# Altium PCB PCB.PcbDoc (part 1 of 3)
Units mm, origin at the board's own origin, x right, y up, seen from the top; angles counter-clockwise.
Board outline 60.66 x 261 mm, 2 copper layers (Top Layer, Bottom Layer); 258 components, 193 nets, 900 pads, 4 vias.
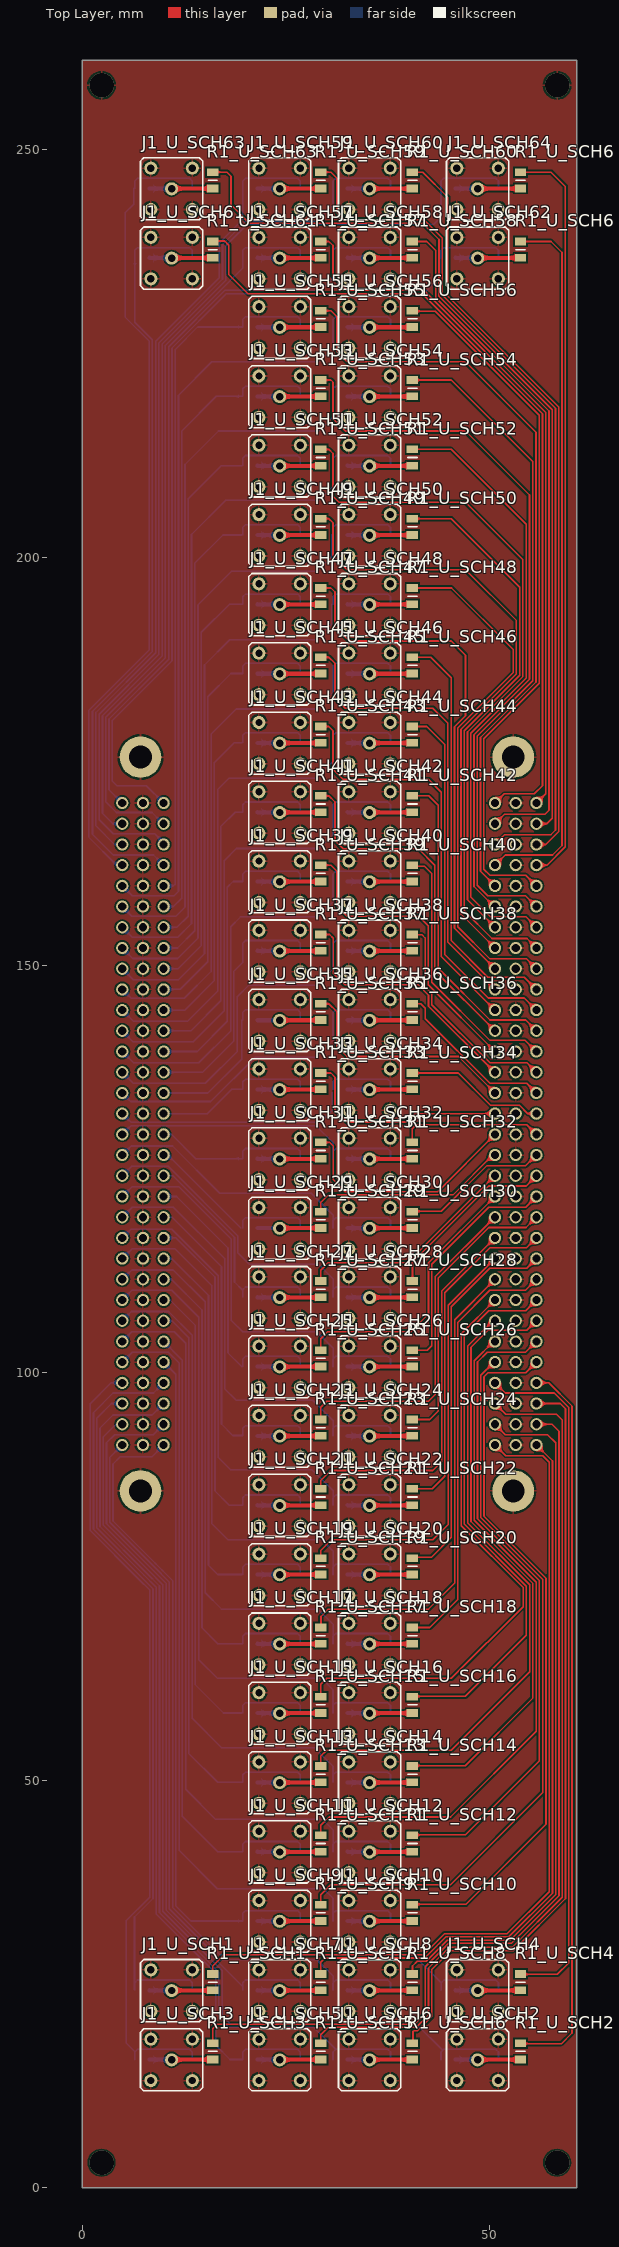
[diagram p0: Top Layer view]
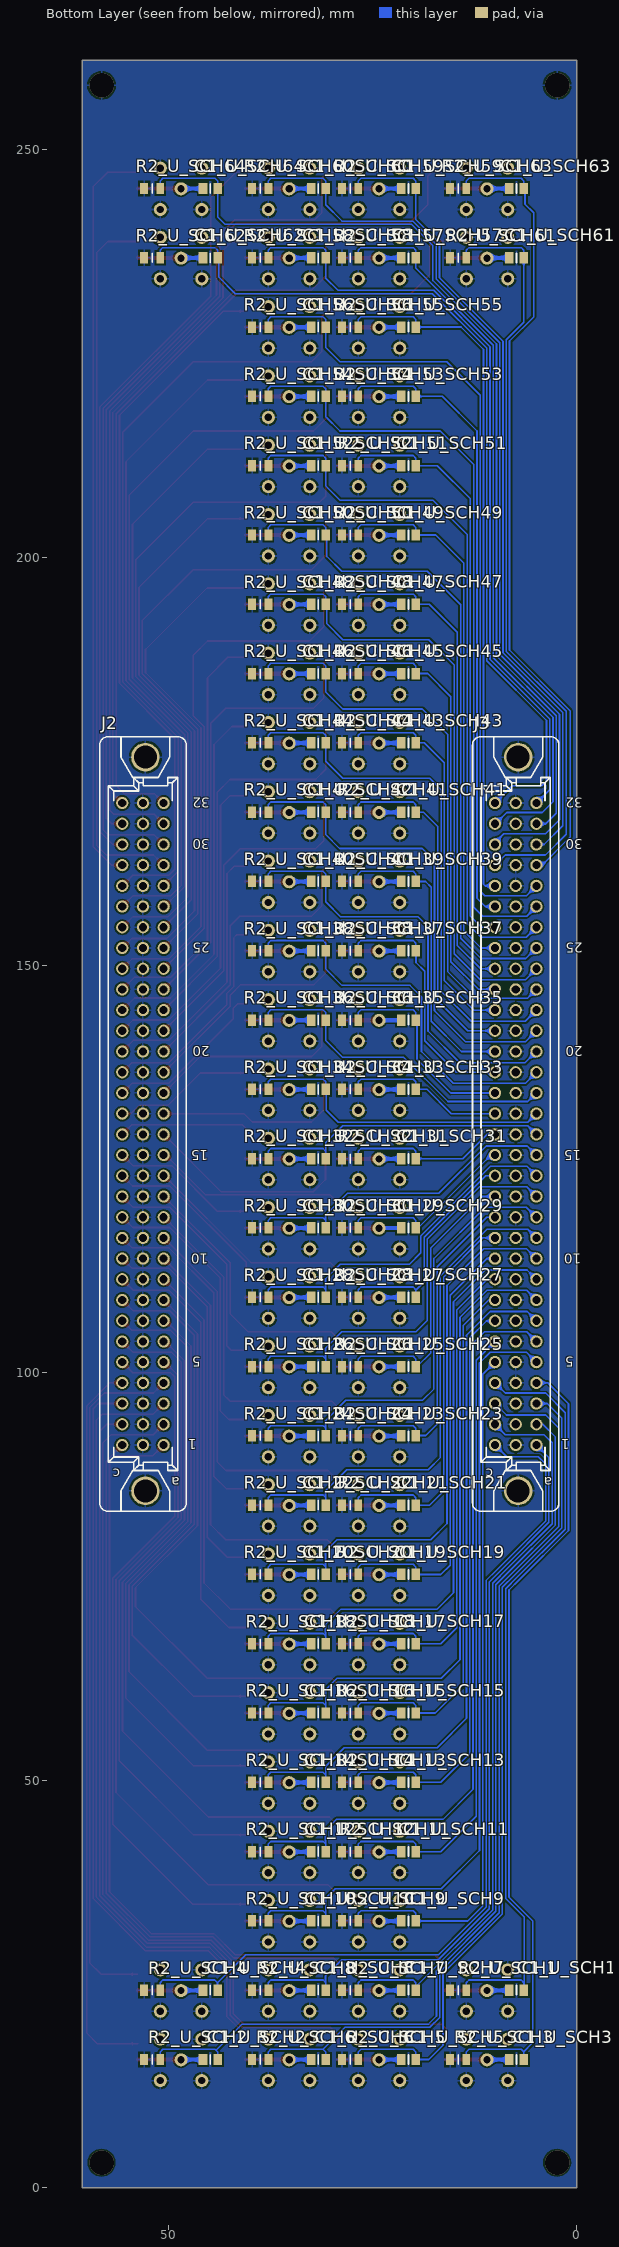
[diagram p1: Bottom Layer view, seen from below]
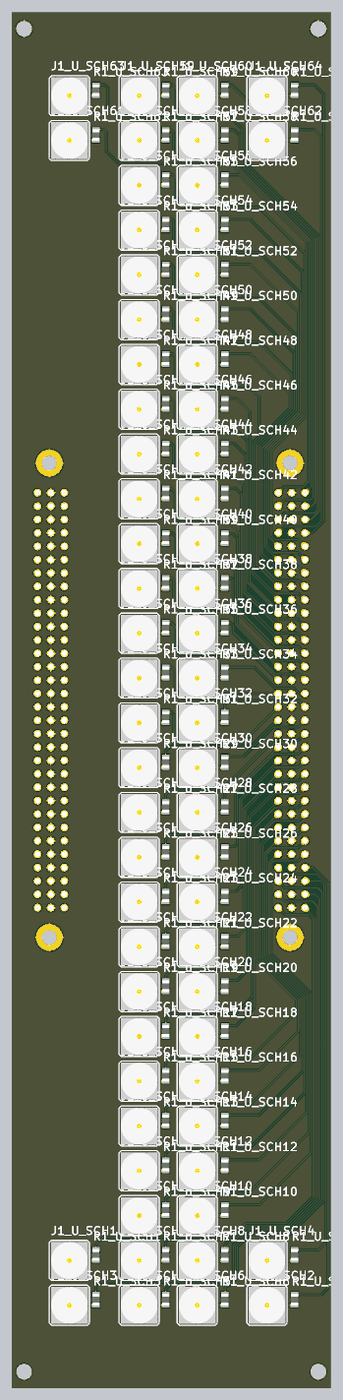
[diagram p4: 3D render of the assembled board from above, using the file's embedded part models]
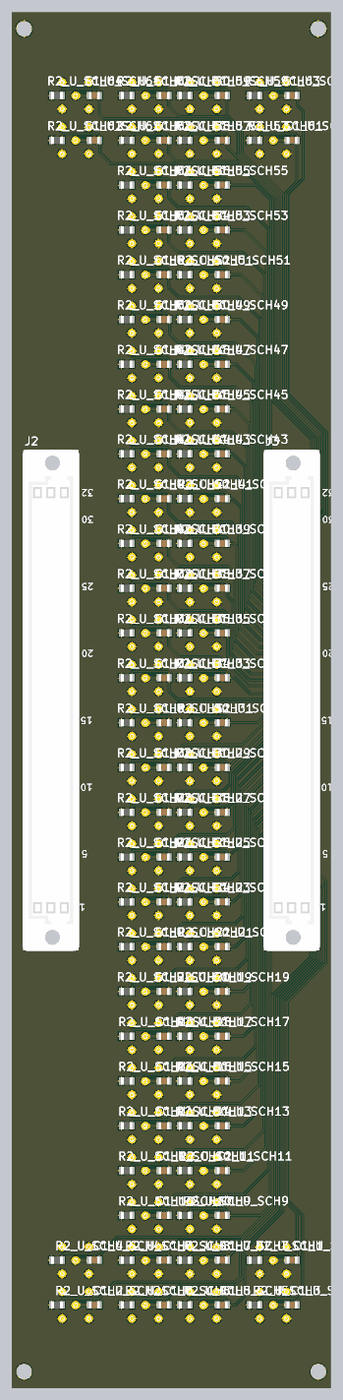
[diagram p5: 3D render of the assembled board from below, using the file's embedded part models]

## Layer stack, top to bottom
Top Solder: solder mask 0.0102, Solder Resist, Dk 3.5
Top Layer: signal copper 0.0356
Dielectric 1: dielectric 0.32, FR-4, Dk 4.8
Bottom Layer: signal copper 0.0356
Bottom Solder: solder mask 0.0102, Solder Resist, Dk 3.5

## Board outline
0,0 0,261 60.66,261 60.66,0

## Design rules (kind name [scope] priority, off if disabled: settings)
Clearance [All] p1: gap=0.2 ignorepadtopadclearanceinfootprint=FALSE
PolygonConnect [All] p1: connectstyle=Relief reliefconductorwidth=0.254 reliefentries=4 polygonreliefangle="90 Angle" airgapwidth=0.254
RoomDefinition Main [InComponentClass('Main')] p1: confinementstyle=ConfineIn formatcopy=TRUE lockcomponents=FALSE outline -73.725,-11.75 -22.925,-11.75 -22.925,13.65 -73.725,13.65
RoomDefinition U_SCH64 [InComponentClass('U_SCH64')] p2: confinementstyle=ConfineIn formatcopy=TRUE lockcomponents=FALSE outline 43.025,241 56.275,241 56.275,249.5 43.025,249.5
RoomDefinition U_SCH63 [InComponentClass('U_SCH63')] p3: confinementstyle=ConfineIn formatcopy=FALSE lockcomponents=FALSE outline 3.275,241 16.525,241 16.525,249.5 3.275,249.5
RoomDefinition U_SCH62 [InComponentClass('U_SCH62')] p4: confinementstyle=ConfineIn formatcopy=TRUE lockcomponents=FALSE outline 43.025,232.5 56.275,232.5 56.275,241 43.025,241
RoomDefinition U_SCH61 [InComponentClass('U_SCH61')] p5: confinementstyle=ConfineIn formatcopy=FALSE lockcomponents=FALSE outline 3.275,232.5 16.525,232.5 16.525,241 3.275,241
RoomDefinition U_SCH60 [InComponentClass('U_SCH60')] p6: confinementstyle=ConfineIn formatcopy=TRUE lockcomponents=FALSE outline 29.775,241 43.025,241 43.025,249.5 29.775,249.5
RoomDefinition U_SCH59 [InComponentClass('U_SCH59')] p7: confinementstyle=ConfineIn formatcopy=FALSE lockcomponents=FALSE outline 16.525,241 29.775,241 29.775,249.5 16.525,249.5
RoomDefinition U_SCH58 [InComponentClass('U_SCH58')] p8: confinementstyle=ConfineIn formatcopy=TRUE lockcomponents=FALSE outline 29.775,232.5 43.025,232.5 43.025,241 29.775,241
RoomDefinition U_SCH57 [InComponentClass('U_SCH57')] p9: confinementstyle=ConfineIn formatcopy=FALSE lockcomponents=FALSE outline 16.525,232.5 29.775,232.5 29.775,241 16.525,241
RoomDefinition U_SCH56 [InComponentClass('U_SCH56')] p10: confinementstyle=ConfineIn formatcopy=TRUE lockcomponents=FALSE outline 29.775,224 43.025,224 43.025,232.5 29.775,232.5
RoomDefinition U_SCH55 [InComponentClass('U_SCH55')] p11: confinementstyle=ConfineIn formatcopy=FALSE lockcomponents=FALSE outline 16.525,224 29.775,224 29.775,232.5 16.525,232.5
RoomDefinition U_SCH54 [InComponentClass('U_SCH54')] p12: confinementstyle=ConfineIn formatcopy=TRUE lockcomponents=FALSE outline 29.775,215.5 43.025,215.5 43.025,224 29.775,224
RoomDefinition U_SCH53 [InComponentClass('U_SCH53')] p13: confinementstyle=ConfineIn formatcopy=FALSE lockcomponents=FALSE outline 16.525,215.5 29.775,215.5 29.775,224 16.525,224
RoomDefinition U_SCH52 [InComponentClass('U_SCH52')] p14: confinementstyle=ConfineIn formatcopy=TRUE lockcomponents=FALSE outline 29.775,207 43.025,207 43.025,215.5 29.775,215.5
RoomDefinition U_SCH51 [InComponentClass('U_SCH51')] p15: confinementstyle=ConfineIn formatcopy=FALSE lockcomponents=FALSE outline 16.525,207 29.775,207 29.775,215.5 16.525,215.5
RoomDefinition U_SCH50 [InComponentClass('U_SCH50')] p16: confinementstyle=ConfineIn formatcopy=TRUE lockcomponents=FALSE outline 29.775,198.5 43.025,198.5 43.025,207 29.775,207
RoomDefinition U_SCH49 [InComponentClass('U_SCH49')] p17: confinementstyle=ConfineIn formatcopy=FALSE lockcomponents=FALSE outline 16.525,198.5 29.775,198.5 29.775,207 16.525,207
RoomDefinition U_SCH48 [InComponentClass('U_SCH48')] p18: confinementstyle=ConfineIn formatcopy=TRUE lockcomponents=FALSE outline 29.775,190 43.025,190 43.025,198.5 29.775,198.5
RoomDefinition U_SCH47 [InComponentClass('U_SCH47')] p19: confinementstyle=ConfineIn formatcopy=FALSE lockcomponents=FALSE outline 16.525,190 29.775,190 29.775,198.5 16.525,198.5
RoomDefinition U_SCH46 [InComponentClass('U_SCH46')] p20: confinementstyle=ConfineIn formatcopy=TRUE lockcomponents=FALSE outline 29.775,181.5 43.025,181.5 43.025,190 29.775,190
RoomDefinition U_SCH45 [InComponentClass('U_SCH45')] p21: confinementstyle=ConfineIn formatcopy=FALSE lockcomponents=FALSE outline 16.525,181.5 29.775,181.5 29.775,190 16.525,190
RoomDefinition U_SCH44 [InComponentClass('U_SCH44')] p22: confinementstyle=ConfineIn formatcopy=TRUE lockcomponents=FALSE outline 29.775,173 43.025,173 43.025,181.5 29.775,181.5
RoomDefinition U_SCH43 [InComponentClass('U_SCH43')] p23: confinementstyle=ConfineIn formatcopy=FALSE lockcomponents=FALSE outline 16.525,173 29.775,173 29.775,181.5 16.525,181.5
RoomDefinition U_SCH42 [InComponentClass('U_SCH42')] p24: confinementstyle=ConfineIn formatcopy=TRUE lockcomponents=FALSE outline 29.775,164.5 43.025,164.5 43.025,173 29.775,173
RoomDefinition U_SCH41 [InComponentClass('U_SCH41')] p25: confinementstyle=ConfineIn formatcopy=FALSE lockcomponents=FALSE outline 16.525,164.5 29.775,164.5 29.775,173 16.525,173
RoomDefinition U_SCH40 [InComponentClass('U_SCH40')] p26: confinementstyle=ConfineIn formatcopy=TRUE lockcomponents=FALSE outline 29.775,156 43.025,156 43.025,164.5 29.775,164.5
RoomDefinition U_SCH39 [InComponentClass('U_SCH39')] p27: confinementstyle=ConfineIn formatcopy=FALSE lockcomponents=FALSE outline 16.525,156 29.775,156 29.775,164.5 16.525,164.5
RoomDefinition U_SCH38 [InComponentClass('U_SCH38')] p28: confinementstyle=ConfineIn formatcopy=TRUE lockcomponents=FALSE outline 29.775,147.5 43.025,147.5 43.025,156 29.775,156
RoomDefinition U_SCH37 [InComponentClass('U_SCH37')] p29: confinementstyle=ConfineIn formatcopy=FALSE lockcomponents=FALSE outline 16.525,147.5 29.775,147.5 29.775,156 16.525,156
RoomDefinition U_SCH36 [InComponentClass('U_SCH36')] p30: confinementstyle=ConfineIn formatcopy=TRUE lockcomponents=FALSE outline 29.775,139 43.025,139 43.025,147.5 29.775,147.5
RoomDefinition U_SCH35 [InComponentClass('U_SCH35')] p31: confinementstyle=ConfineIn formatcopy=FALSE lockcomponents=FALSE outline 16.525,139 29.775,139 29.775,147.5 16.525,147.5
RoomDefinition U_SCH34 [InComponentClass('U_SCH34')] p32: confinementstyle=ConfineIn formatcopy=TRUE lockcomponents=FALSE outline 29.775,130.5 43.025,130.5 43.025,139 29.775,139
RoomDefinition U_SCH33 [InComponentClass('U_SCH33')] p33: confinementstyle=ConfineIn formatcopy=FALSE lockcomponents=FALSE outline 16.525,130.5 29.775,130.5 29.775,139 16.525,139
RoomDefinition U_SCH32 [InComponentClass('U_SCH32')] p34: confinementstyle=ConfineIn formatcopy=TRUE lockcomponents=FALSE outline 29.775,122 43.025,122 43.025,130.5 29.775,130.5
RoomDefinition U_SCH31 [InComponentClass('U_SCH31')] p35: confinementstyle=ConfineIn formatcopy=FALSE lockcomponents=FALSE outline 16.525,122 29.775,122 29.775,130.5 16.525,130.5
RoomDefinition U_SCH30 [InComponentClass('U_SCH30')] p36: confinementstyle=ConfineIn formatcopy=TRUE lockcomponents=FALSE outline 29.775,113.5 43.025,113.5 43.025,122 29.775,122
RoomDefinition U_SCH29 [InComponentClass('U_SCH29')] p37: confinementstyle=ConfineIn formatcopy=FALSE lockcomponents=FALSE outline 16.525,113.5 29.775,113.5 29.775,122 16.525,122
RoomDefinition U_SCH28 [InComponentClass('U_SCH28')] p38: confinementstyle=ConfineIn formatcopy=TRUE lockcomponents=FALSE outline 29.775,105 43.025,105 43.025,113.5 29.775,113.5
RoomDefinition U_SCH27 [InComponentClass('U_SCH27')] p39: confinementstyle=ConfineIn formatcopy=FALSE lockcomponents=FALSE outline 16.525,105 29.775,105 29.775,113.5 16.525,113.5
RoomDefinition U_SCH26 [InComponentClass('U_SCH26')] p40: confinementstyle=ConfineIn formatcopy=TRUE lockcomponents=FALSE outline 29.775,96.5 43.025,96.5 43.025,105 29.775,105
RoomDefinition U_SCH25 [InComponentClass('U_SCH25')] p41: confinementstyle=ConfineIn formatcopy=FALSE lockcomponents=FALSE outline 16.525,96.5 29.775,96.5 29.775,105 16.525,105
RoomDefinition U_SCH24 [InComponentClass('U_SCH24')] p42: confinementstyle=ConfineIn formatcopy=TRUE lockcomponents=FALSE outline 29.775,88 43.025,88 43.025,96.5 29.775,96.5
RoomDefinition U_SCH23 [InComponentClass('U_SCH23')] p43: confinementstyle=ConfineIn formatcopy=FALSE lockcomponents=FALSE outline 16.525,88 29.775,88 29.775,96.5 16.525,96.5
RoomDefinition U_SCH22 [InComponentClass('U_SCH22')] p44: confinementstyle=ConfineIn formatcopy=TRUE lockcomponents=FALSE outline 29.775,79.5 43.025,79.5 43.025,88 29.775,88
RoomDefinition U_SCH21 [InComponentClass('U_SCH21')] p45: confinementstyle=ConfineIn formatcopy=FALSE lockcomponents=FALSE outline 16.525,79.5 29.775,79.5 29.775,88 16.525,88
RoomDefinition U_SCH20 [InComponentClass('U_SCH20')] p46: confinementstyle=ConfineIn formatcopy=TRUE lockcomponents=FALSE outline 29.775,71 43.025,71 43.025,79.5 29.775,79.5
RoomDefinition U_SCH19 [InComponentClass('U_SCH19')] p47: confinementstyle=ConfineIn formatcopy=FALSE lockcomponents=FALSE outline 16.525,71 29.775,71 29.775,79.5 16.525,79.5
RoomDefinition U_SCH18 [InComponentClass('U_SCH18')] p48: confinementstyle=ConfineIn formatcopy=TRUE lockcomponents=FALSE outline 29.775,62.5 43.025,62.5 43.025,71 29.775,71
RoomDefinition U_SCH17 [InComponentClass('U_SCH17')] p49: confinementstyle=ConfineIn formatcopy=FALSE lockcomponents=FALSE outline 16.525,62.5 29.775,62.5 29.775,71 16.525,71
RoomDefinition U_SCH16 [InComponentClass('U_SCH16')] p50: confinementstyle=ConfineIn formatcopy=TRUE lockcomponents=FALSE outline 29.775,54 43.025,54 43.025,62.5 29.775,62.5
RoomDefinition U_SCH15 [InComponentClass('U_SCH15')] p51: confinementstyle=ConfineIn formatcopy=FALSE lockcomponents=FALSE outline 16.525,54 29.775,54 29.775,62.5 16.525,62.5
RoomDefinition U_SCH14 [InComponentClass('U_SCH14')] p52: confinementstyle=ConfineIn formatcopy=TRUE lockcomponents=FALSE outline 29.775,45.5 43.025,45.5 43.025,54 29.775,54
RoomDefinition U_SCH13 [InComponentClass('U_SCH13')] p53: confinementstyle=ConfineIn formatcopy=FALSE lockcomponents=FALSE outline 16.525,45.5 29.775,45.5 29.775,54 16.525,54
RoomDefinition U_SCH12 [InComponentClass('U_SCH12')] p54: confinementstyle=ConfineIn formatcopy=TRUE lockcomponents=FALSE outline 29.775,37 43.025,37 43.025,45.5 29.775,45.5
RoomDefinition U_SCH11 [InComponentClass('U_SCH11')] p55: confinementstyle=ConfineIn formatcopy=FALSE lockcomponents=FALSE outline 16.525,37 29.775,37 29.775,45.5 16.525,45.5
RoomDefinition U_SCH10 [InComponentClass('U_SCH10')] p56: confinementstyle=ConfineIn formatcopy=TRUE lockcomponents=FALSE outline 29.775,28.5 43.025,28.5 43.025,37 29.775,37
RoomDefinition U_SCH9 [InComponentClass('U_SCH9')] p57: confinementstyle=ConfineIn formatcopy=FALSE lockcomponents=FALSE outline 16.525,28.5 29.775,28.5 29.775,37 16.525,37
RoomDefinition U_SCH8 [InComponentClass('U_SCH8')] p58: confinementstyle=ConfineIn formatcopy=TRUE lockcomponents=FALSE outline 29.775,20 43.025,20 43.025,28.5 29.775,28.5
RoomDefinition U_SCH7 [InComponentClass('U_SCH7')] p59: confinementstyle=ConfineIn formatcopy=FALSE lockcomponents=FALSE outline 16.525,20 29.775,20 29.775,28.5 16.525,28.5
RoomDefinition U_SCH6 [InComponentClass('U_SCH6')] p60: confinementstyle=ConfineIn formatcopy=TRUE lockcomponents=FALSE outline 29.775,11.5 43.025,11.5 43.025,20 29.775,20
RoomDefinition U_SCH5 [InComponentClass('U_SCH5')] p61: confinementstyle=ConfineIn formatcopy=FALSE lockcomponents=FALSE outline 16.525,11.5 29.775,11.5 29.775,20 16.525,20
RoomDefinition U_SCH4 [InComponentClass('U_SCH4')] p62: confinementstyle=ConfineIn formatcopy=TRUE lockcomponents=FALSE outline 43.025,20 56.275,20 56.275,28.5 43.025,28.5
RoomDefinition U_SCH3 [InComponentClass('U_SCH3')] p63: confinementstyle=ConfineIn formatcopy=FALSE lockcomponents=FALSE outline 3.275,11.5 16.525,11.5 16.525,20 3.275,20
RoomDefinition U_SCH2 [InComponentClass('U_SCH2')] p64: confinementstyle=ConfineIn formatcopy=TRUE lockcomponents=FALSE outline 43.025,11.5 56.275,11.5 56.275,20 43.025,20
RoomDefinition U_SCH1 [InComponentClass('U_SCH1')] p65: confinementstyle=ConfineIn formatcopy=FALSE lockcomponents=FALSE outline 3.275,20 16.525,20 16.525,28.5 3.275,28.5
RoutingVias [All] p1: holewidth=0.711 width=1.27 viastyle="Through Hole" minholewidth=0.711 minwidth=1.27 maxholewidth=0.711 maxwidth=1.27
SolderMaskExpansion [All] p1: expansion=0.102
Width [All] p1: maxlimit=0.5 minlimit=0.2 preferedwidth=0.3
30 further rules are at their usual default settings.

## Classes and differential pairs
channel class SCH: U_SCH1 U_SCH2 U_SCH3 U_SCH4 U_SCH5 U_SCH6 U_SCH7 U_SCH8 U_SCH9 U_SCH10 U_SCH11 U_SCH12 U_SCH13 U_SCH14 U_SCH15 U_SCH16 U_SCH17 U_SCH18 U_SCH19 U_SCH20 U_SCH21 U_SCH22 U_SCH23 U_SCH24 U_SCH25 U_SCH26 U_SCH27 U_SCH28 U_SCH29 U_SCH30 U_SCH31 U_SCH32 U_SCH33 U_SCH34 U_SCH35 U_SCH36 U_SCH37 U_SCH38 U_SCH39 U_SCH40 U_SCH41 U_SCH42 U_SCH43 U_SCH44 U_SCH45 U_SCH46 U_SCH47 U_SCH48 U_SCH49 U_SCH50 U_SCH51 U_SCH52 U_SCH53 U_SCH54 U_SCH55 U_SCH56 U_SCH57 U_SCH58 U_SCH59 U_SCH60 U_SCH61 U_SCH62 U_SCH63 U_SCH64
net class INPUT_T[1..64]: INPUT_T1 INPUT_T2 INPUT_T3 INPUT_T4 INPUT_T5 INPUT_T6 INPUT_T7 INPUT_T8 INPUT_T9 INPUT_T10 INPUT_T11 INPUT_T12 INPUT_T13 INPUT_T14 INPUT_T15 INPUT_T16 INPUT_T17 INPUT_T18 INPUT_T19 INPUT_T20 INPUT_T21 INPUT_T22 INPUT_T23 INPUT_T24 INPUT_T25 INPUT_T26 INPUT_T27 INPUT_T28 INPUT_T29 INPUT_T30 INPUT_T31 INPUT_T32 INPUT_T33 INPUT_T34 INPUT_T35 INPUT_T36 INPUT_T37 INPUT_T38 INPUT_T39 INPUT_T40 INPUT_T41 INPUT_T42 INPUT_T43 INPUT_T44 INPUT_T45 INPUT_T46 INPUT_T47 INPUT_T48 INPUT_T49 INPUT_T50 INPUT_T51 INPUT_T52 INPUT_T53 INPUT_T54 INPUT_T55 INPUT_T56 INPUT_T57 INPUT_T58 INPUT_T59 INPUT_T60 INPUT_T61 INPUT_T62 INPUT_T63 INPUT_T64
net class HV_OFFSET[1..64]: HV_OFFSET1 HV_OFFSET2 HV_OFFSET3 HV_OFFSET4 HV_OFFSET5 HV_OFFSET6 HV_OFFSET7 HV_OFFSET8 HV_OFFSET9 HV_OFFSET10 HV_OFFSET11 HV_OFFSET12 HV_OFFSET13 HV_OFFSET14 HV_OFFSET15 HV_OFFSET16 HV_OFFSET17 HV_OFFSET18 HV_OFFSET19 HV_OFFSET20 HV_OFFSET21 HV_OFFSET22 HV_OFFSET23 HV_OFFSET24 HV_OFFSET25 HV_OFFSET26 HV_OFFSET27 HV_OFFSET28 HV_OFFSET29 HV_OFFSET30 HV_OFFSET31 HV_OFFSET32 HV_OFFSET33 HV_OFFSET34 HV_OFFSET35 HV_OFFSET36 HV_OFFSET37 HV_OFFSET38 HV_OFFSET39 HV_OFFSET40 HV_OFFSET41 HV_OFFSET42 HV_OFFSET43 HV_OFFSET44 HV_OFFSET45 HV_OFFSET46 HV_OFFSET47 HV_OFFSET48 HV_OFFSET49 HV_OFFSET50 HV_OFFSET51 HV_OFFSET52 HV_OFFSET53 HV_OFFSET54 HV_OFFSET55 HV_OFFSET56 HV_OFFSET57 HV_OFFSET58 HV_OFFSET59 HV_OFFSET60 HV_OFFSET61 HV_OFFSET62 HV_OFFSET63 HV_OFFSET64
component class U_SCH64: C1_U_SCH64 J1_U_SCH64 R1_U_SCH64 R2_U_SCH64
component class U_SCH63: C1_U_SCH63 J1_U_SCH63 R1_U_SCH63 R2_U_SCH63
component class U_SCH62: C1_U_SCH62 J1_U_SCH62 R1_U_SCH62 R2_U_SCH62
component class U_SCH61: C1_U_SCH61 J1_U_SCH61 R1_U_SCH61 R2_U_SCH61
component class U_SCH60: C1_U_SCH60 J1_U_SCH60 R1_U_SCH60 R2_U_SCH60
component class U_SCH59: C1_U_SCH59 J1_U_SCH59 R1_U_SCH59 R2_U_SCH59
component class U_SCH58: C1_U_SCH58 J1_U_SCH58 R1_U_SCH58 R2_U_SCH58
component class U_SCH57: C1_U_SCH57 J1_U_SCH57 R1_U_SCH57 R2_U_SCH57
component class U_SCH56: C1_U_SCH56 J1_U_SCH56 R1_U_SCH56 R2_U_SCH56
component class U_SCH55: C1_U_SCH55 J1_U_SCH55 R1_U_SCH55 R2_U_SCH55
component class U_SCH54: C1_U_SCH54 J1_U_SCH54 R1_U_SCH54 R2_U_SCH54
component class U_SCH53: C1_U_SCH53 J1_U_SCH53 R1_U_SCH53 R2_U_SCH53
component class U_SCH52: C1_U_SCH52 J1_U_SCH52 R1_U_SCH52 R2_U_SCH52
component class U_SCH51: C1_U_SCH51 J1_U_SCH51 R1_U_SCH51 R2_U_SCH51
component class U_SCH50: C1_U_SCH50 J1_U_SCH50 R1_U_SCH50 R2_U_SCH50
component class U_SCH49: C1_U_SCH49 J1_U_SCH49 R1_U_SCH49 R2_U_SCH49
component class U_SCH48: C1_U_SCH48 J1_U_SCH48 R1_U_SCH48 R2_U_SCH48
component class U_SCH47: C1_U_SCH47 J1_U_SCH47 R1_U_SCH47 R2_U_SCH47
component class U_SCH46: C1_U_SCH46 J1_U_SCH46 R1_U_SCH46 R2_U_SCH46
component class U_SCH45: C1_U_SCH45 J1_U_SCH45 R1_U_SCH45 R2_U_SCH45
component class U_SCH44: C1_U_SCH44 J1_U_SCH44 R1_U_SCH44 R2_U_SCH44
component class U_SCH43: C1_U_SCH43 J1_U_SCH43 R1_U_SCH43 R2_U_SCH43
component class U_SCH42: C1_U_SCH42 J1_U_SCH42 R1_U_SCH42 R2_U_SCH42
component class U_SCH41: C1_U_SCH41 J1_U_SCH41 R1_U_SCH41 R2_U_SCH41
component class U_SCH40: C1_U_SCH40 J1_U_SCH40 R1_U_SCH40 R2_U_SCH40
component class U_SCH39: C1_U_SCH39 J1_U_SCH39 R1_U_SCH39 R2_U_SCH39
component class U_SCH38: C1_U_SCH38 J1_U_SCH38 R1_U_SCH38 R2_U_SCH38
component class U_SCH37: C1_U_SCH37 J1_U_SCH37 R1_U_SCH37 R2_U_SCH37
component class U_SCH36: C1_U_SCH36 J1_U_SCH36 R1_U_SCH36 R2_U_SCH36
component class U_SCH35: C1_U_SCH35 J1_U_SCH35 R1_U_SCH35 R2_U_SCH35
component class U_SCH34: C1_U_SCH34 J1_U_SCH34 R1_U_SCH34 R2_U_SCH34
component class U_SCH33: C1_U_SCH33 J1_U_SCH33 R1_U_SCH33 R2_U_SCH33
component class U_SCH32: C1_U_SCH32 J1_U_SCH32 R1_U_SCH32 R2_U_SCH32
component class U_SCH31: C1_U_SCH31 J1_U_SCH31 R1_U_SCH31 R2_U_SCH31
component class U_SCH30: C1_U_SCH30 J1_U_SCH30 R1_U_SCH30 R2_U_SCH30
component class U_SCH29: C1_U_SCH29 J1_U_SCH29 R1_U_SCH29 R2_U_SCH29
component class U_SCH28: C1_U_SCH28 J1_U_SCH28 R1_U_SCH28 R2_U_SCH28
component class U_SCH27: C1_U_SCH27 J1_U_SCH27 R1_U_SCH27 R2_U_SCH27
component class U_SCH26: C1_U_SCH26 J1_U_SCH26 R1_U_SCH26 R2_U_SCH26
component class U_SCH25: C1_U_SCH25 J1_U_SCH25 R1_U_SCH25 R2_U_SCH25
component class U_SCH24: C1_U_SCH24 J1_U_SCH24 R1_U_SCH24 R2_U_SCH24
component class U_SCH23: C1_U_SCH23 J1_U_SCH23 R1_U_SCH23 R2_U_SCH23
component class U_SCH22: C1_U_SCH22 J1_U_SCH22 R1_U_SCH22 R2_U_SCH22
component class U_SCH21: C1_U_SCH21 J1_U_SCH21 R1_U_SCH21 R2_U_SCH21
component class U_SCH20: C1_U_SCH20 J1_U_SCH20 R1_U_SCH20 R2_U_SCH20
component class U_SCH19: C1_U_SCH19 J1_U_SCH19 R1_U_SCH19 R2_U_SCH19
component class U_SCH18: C1_U_SCH18 J1_U_SCH18 R1_U_SCH18 R2_U_SCH18
component class U_SCH17: C1_U_SCH17 J1_U_SCH17 R1_U_SCH17 R2_U_SCH17
component class U_SCH16: C1_U_SCH16 J1_U_SCH16 R1_U_SCH16 R2_U_SCH16
component class U_SCH15: C1_U_SCH15 J1_U_SCH15 R1_U_SCH15 R2_U_SCH15
component class U_SCH14: C1_U_SCH14 J1_U_SCH14 R1_U_SCH14 R2_U_SCH14
component class U_SCH13: C1_U_SCH13 J1_U_SCH13 R1_U_SCH13 R2_U_SCH13
component class U_SCH12: C1_U_SCH12 J1_U_SCH12 R1_U_SCH12 R2_U_SCH12
component class U_SCH11: C1_U_SCH11 J1_U_SCH11 R1_U_SCH11 R2_U_SCH11
component class U_SCH10: C1_U_SCH10 J1_U_SCH10 R1_U_SCH10 R2_U_SCH10
component class U_SCH9: C1_U_SCH9 J1_U_SCH9 R1_U_SCH9 R2_U_SCH9
component class U_SCH8: C1_U_SCH8 J1_U_SCH8 R1_U_SCH8 R2_U_SCH8
component class U_SCH7: C1_U_SCH7 J1_U_SCH7 R1_U_SCH7 R2_U_SCH7
component class U_SCH6: C1_U_SCH6 J1_U_SCH6 R1_U_SCH6 R2_U_SCH6
component class U_SCH5: C1_U_SCH5 J1_U_SCH5 R1_U_SCH5 R2_U_SCH5
component class U_SCH4: C1_U_SCH4 J1_U_SCH4 R1_U_SCH4 R2_U_SCH4
component class U_SCH3: C1_U_SCH3 J1_U_SCH3 R1_U_SCH3 R2_U_SCH3
component class U_SCH2: C1_U_SCH2 J1_U_SCH2 R1_U_SCH2 R2_U_SCH2
component class U_SCH1: C1_U_SCH1 J1_U_SCH1 R1_U_SCH1 R2_U_SCH1
component class Main: J2 J3

## Components (designator, comment, footprint, x,y, rotation, side; value= is the part's Value field where it differs from the comment)
C1_U_SCH1 "10nF" CAPC2012X135N 7.375,24.25 r180 bottom (schematic designator C1)
C1_U_SCH2 "10nF" CAPC2012X135N 44.925,15.75 r180 bottom (schematic designator C1)
C1_U_SCH3 "10nF" CAPC2012X135N 7.375,15.75 r180 bottom (schematic designator C1)
C1_U_SCH4 "10nF" CAPC2012X135N 44.925,24.25 r180 bottom (schematic designator C1)
C1_U_SCH5 "10nF" CAPC2012X135N 20.625,15.75 r180 bottom (schematic designator C1)
C1_U_SCH6 "10nF" CAPC2012X135N 31.675,15.75 r180 bottom (schematic designator C1)
C1_U_SCH7 "10nF" CAPC2012X135N 20.625,24.25 r180 bottom (schematic designator C1)
C1_U_SCH8 "10nF" CAPC2012X135N 31.675,24.25 r180 bottom (schematic designator C1)
C1_U_SCH9 "10nF" CAPC2012X135N 20.625,32.75 r180 bottom (schematic designator C1)
C1_U_SCH10 "10nF" CAPC2012X135N 31.675,32.75 r180 bottom (schematic designator C1)
C1_U_SCH11 "10nF" CAPC2012X135N 20.625,41.25 r180 bottom (schematic designator C1)
C1_U_SCH12 "10nF" CAPC2012X135N 31.675,41.25 r180 bottom (schematic designator C1)
C1_U_SCH13 "10nF" CAPC2012X135N 20.625,49.75 r180 bottom (schematic designator C1)
C1_U_SCH14 "10nF" CAPC2012X135N 31.675,49.75 r180 bottom (schematic designator C1)
C1_U_SCH15 "10nF" CAPC2012X135N 20.625,58.25 r180 bottom (schematic designator C1)
C1_U_SCH16 "10nF" CAPC2012X135N 31.675,58.25 r180 bottom (schematic designator C1)
C1_U_SCH17 "10nF" CAPC2012X135N 20.625,66.75 r180 bottom (schematic designator C1)
C1_U_SCH18 "10nF" CAPC2012X135N 31.675,66.75 r180 bottom (schematic designator C1)
C1_U_SCH19 "10nF" CAPC2012X135N 20.625,75.25 r180 bottom (schematic designator C1)
C1_U_SCH20 "10nF" CAPC2012X135N 31.675,75.25 r180 bottom (schematic designator C1)
C1_U_SCH21 "10nF" CAPC2012X135N 20.625,83.75 r180 bottom (schematic designator C1)
C1_U_SCH22 "10nF" CAPC2012X135N 31.675,83.75 r180 bottom (schematic designator C1)
C1_U_SCH23 "10nF" CAPC2012X135N 20.625,92.25 r180 bottom (schematic designator C1)
C1_U_SCH24 "10nF" CAPC2012X135N 31.675,92.25 r180 bottom (schematic designator C1)
C1_U_SCH25 "10nF" CAPC2012X135N 20.625,100.75 r180 bottom (schematic designator C1)
C1_U_SCH26 "10nF" CAPC2012X135N 31.675,100.75 r180 bottom (schematic designator C1)
C1_U_SCH27 "10nF" CAPC2012X135N 20.625,109.25 r180 bottom (schematic designator C1)
C1_U_SCH28 "10nF" CAPC2012X135N 31.675,109.25 r180 bottom (schematic designator C1)
C1_U_SCH29 "10nF" CAPC2012X135N 20.625,117.75 r180 bottom (schematic designator C1)
C1_U_SCH30 "10nF" CAPC2012X135N 31.675,117.75 r180 bottom (schematic designator C1)
C1_U_SCH31 "10nF" CAPC2012X135N 20.625,126.25 r180 bottom (schematic designator C1)
C1_U_SCH32 "10nF" CAPC2012X135N 31.675,126.25 r180 bottom (schematic designator C1)
C1_U_SCH33 "10nF" CAPC2012X135N 20.625,134.75 r180 bottom (schematic designator C1)
C1_U_SCH34 "10nF" CAPC2012X135N 31.675,134.75 r180 bottom (schematic designator C1)
C1_U_SCH35 "10nF" CAPC2012X135N 20.625,143.25 r180 bottom (schematic designator C1)
C1_U_SCH36 "10nF" CAPC2012X135N 31.675,143.25 r180 bottom (schematic designator C1)
C1_U_SCH37 "10nF" CAPC2012X135N 20.625,151.75 r180 bottom (schematic designator C1)
C1_U_SCH38 "10nF" CAPC2012X135N 31.675,151.75 r180 bottom (schematic designator C1)
C1_U_SCH39 "10nF" CAPC2012X135N 20.625,160.25 r180 bottom (schematic designator C1)
C1_U_SCH40 "10nF" CAPC2012X135N 31.675,160.25 r180 bottom (schematic designator C1)
C1_U_SCH41 "10nF" CAPC2012X135N 20.625,168.75 r180 bottom (schematic designator C1)
C1_U_SCH42 "10nF" CAPC2012X135N 31.675,168.75 r180 bottom (schematic designator C1)
C1_U_SCH43 "10nF" CAPC2012X135N 20.625,177.25 r180 bottom (schematic designator C1)
C1_U_SCH44 "10nF" CAPC2012X135N 31.675,177.25 r180 bottom (schematic designator C1)
C1_U_SCH45 "10nF" CAPC2012X135N 20.625,185.75 r180 bottom (schematic designator C1)
C1_U_SCH46 "10nF" CAPC2012X135N 31.675,185.75 r180 bottom (schematic designator C1)
C1_U_SCH47 "10nF" CAPC2012X135N 20.625,194.25 r180 bottom (schematic designator C1)
C1_U_SCH48 "10nF" CAPC2012X135N 31.675,194.25 r180 bottom (schematic designator C1)
C1_U_SCH49 "10nF" CAPC2012X135N 20.625,202.75 r180 bottom (schematic designator C1)
C1_U_SCH50 "10nF" CAPC2012X135N 31.675,202.75 r180 bottom (schematic designator C1)
C1_U_SCH51 "10nF" CAPC2012X135N 20.625,211.25 r180 bottom (schematic designator C1)
C1_U_SCH52 "10nF" CAPC2012X135N 31.675,211.25 r180 bottom (schematic designator C1)
C1_U_SCH53 "10nF" CAPC2012X135N 20.625,219.75 r180 bottom (schematic designator C1)
C1_U_SCH54 "10nF" CAPC2012X135N 31.675,219.75 r180 bottom (schematic designator C1)
C1_U_SCH55 "10nF" CAPC2012X135N 20.625,228.25 r180 bottom (schematic designator C1)
C1_U_SCH56 "10nF" CAPC2012X135N 31.675,228.25 r180 bottom (schematic designator C1)
C1_U_SCH57 "10nF" CAPC2012X135N 20.625,236.75 r180 bottom (schematic designator C1)
C1_U_SCH58 "10nF" CAPC2012X135N 31.675,236.75 r180 bottom (schematic designator C1)
C1_U_SCH59 "10nF" CAPC2012X135N 20.625,245.25 r180 bottom (schematic designator C1)
C1_U_SCH60 "10nF" CAPC2012X135N 31.675,245.25 r180 bottom (schematic designator C1)
C1_U_SCH61 "10nF" CAPC2012X135N 7.375,236.75 r180 bottom (schematic designator C1)
C1_U_SCH62 "10nF" CAPC2012X135N 44.925,236.75 r180 bottom (schematic designator C1)
C1_U_SCH63 "10nF" CAPC2012X135N 7.375,245.25 r180 bottom (schematic designator C1)
C1_U_SCH64 "10nF" CAPC2012X135N 44.925,245.25 r180 bottom (schematic designator C1)
J1_U_SCH1 "LEMO 00" LEMO_EPA.00.250.NTN 10.985,24.21 r90 top (schematic designator J1)
J1_U_SCH2 "LEMO 00" LEMO_EPA.00.250.NTN 48.515,15.71 r90 top (schematic designator J1)
J1_U_SCH3 "LEMO 00" LEMO_EPA.00.250.NTN 10.985,15.71 r90 top (schematic designator J1)
J1_U_SCH4 "LEMO 00" LEMO_EPA.00.250.NTN 48.515,24.21 r90 top (schematic designator J1)
J1_U_SCH5 "LEMO 00" LEMO_EPA.00.250.NTN 24.235,15.71 r90 top (schematic designator J1)
J1_U_SCH6 "LEMO 00" LEMO_EPA.00.250.NTN 35.265,15.71 r90 top (schematic designator J1)
J1_U_SCH7 "LEMO 00" LEMO_EPA.00.250.NTN 24.235,24.21 r90 top (schematic designator J1)
J1_U_SCH8 "LEMO 00" LEMO_EPA.00.250.NTN 35.265,24.21 r90 top (schematic designator J1)
J1_U_SCH9 "LEMO 00" LEMO_EPA.00.250.NTN 24.235,32.71 r90 top (schematic designator J1)
J1_U_SCH10 "LEMO 00" LEMO_EPA.00.250.NTN 35.265,32.71 r90 top (schematic designator J1)
J1_U_SCH11 "LEMO 00" LEMO_EPA.00.250.NTN 24.235,41.21 r90 top (schematic designator J1)
J1_U_SCH12 "LEMO 00" LEMO_EPA.00.250.NTN 35.265,41.21 r90 top (schematic designator J1)
J1_U_SCH13 "LEMO 00" LEMO_EPA.00.250.NTN 24.235,49.71 r90 top (schematic designator J1)
J1_U_SCH14 "LEMO 00" LEMO_EPA.00.250.NTN 35.265,49.71 r90 top (schematic designator J1)
J1_U_SCH15 "LEMO 00" LEMO_EPA.00.250.NTN 24.235,58.21 r90 top (schematic designator J1)
J1_U_SCH16 "LEMO 00" LEMO_EPA.00.250.NTN 35.265,58.21 r90 top (schematic designator J1)
J1_U_SCH17 "LEMO 00" LEMO_EPA.00.250.NTN 24.235,66.71 r90 top (schematic designator J1)
J1_U_SCH18 "LEMO 00" LEMO_EPA.00.250.NTN 35.265,66.71 r90 top (schematic designator J1)
J1_U_SCH19 "LEMO 00" LEMO_EPA.00.250.NTN 24.235,75.21 r90 top (schematic designator J1)
J1_U_SCH20 "LEMO 00" LEMO_EPA.00.250.NTN 35.265,75.21 r90 top (schematic designator J1)
J1_U_SCH21 "LEMO 00" LEMO_EPA.00.250.NTN 24.235,83.71 r90 top (schematic designator J1)
J1_U_SCH22 "LEMO 00" LEMO_EPA.00.250.NTN 35.265,83.71 r90 top (schematic designator J1)
J1_U_SCH23 "LEMO 00" LEMO_EPA.00.250.NTN 24.235,92.21 r90 top (schematic designator J1)
J1_U_SCH24 "LEMO 00" LEMO_EPA.00.250.NTN 35.265,92.21 r90 top (schematic designator J1)
J1_U_SCH25 "LEMO 00" LEMO_EPA.00.250.NTN 24.235,100.71 r90 top (schematic designator J1)
J1_U_SCH26 "LEMO 00" LEMO_EPA.00.250.NTN 35.265,100.71 r90 top (schematic designator J1)
J1_U_SCH27 "LEMO 00" LEMO_EPA.00.250.NTN 24.235,109.21 r90 top (schematic designator J1)
J1_U_SCH28 "LEMO 00" LEMO_EPA.00.250.NTN 35.265,109.21 r90 top (schematic designator J1)
J1_U_SCH29 "LEMO 00" LEMO_EPA.00.250.NTN 24.235,117.71 r90 top (schematic designator J1)
J1_U_SCH30 "LEMO 00" LEMO_EPA.00.250.NTN 35.265,117.71 r90 top (schematic designator J1)
J1_U_SCH31 "LEMO 00" LEMO_EPA.00.250.NTN 24.235,126.21 r90 top (schematic designator J1)
J1_U_SCH32 "LEMO 00" LEMO_EPA.00.250.NTN 35.265,126.21 r90 top (schematic designator J1)
J1_U_SCH33 "LEMO 00" LEMO_EPA.00.250.NTN 24.235,134.71 r90 top (schematic designator J1)
J1_U_SCH34 "LEMO 00" LEMO_EPA.00.250.NTN 35.265,134.71 r90 top (schematic designator J1)
J1_U_SCH35 "LEMO 00" LEMO_EPA.00.250.NTN 24.235,143.21 r90 top (schematic designator J1)
J1_U_SCH36 "LEMO 00" LEMO_EPA.00.250.NTN 35.265,143.21 r90 top (schematic designator J1)
J1_U_SCH37 "LEMO 00" LEMO_EPA.00.250.NTN 24.235,151.71 r90 top (schematic designator J1)
J1_U_SCH38 "LEMO 00" LEMO_EPA.00.250.NTN 35.265,151.71 r90 top (schematic designator J1)
J1_U_SCH39 "LEMO 00" LEMO_EPA.00.250.NTN 24.235,160.21 r90 top (schematic designator J1)
J1_U_SCH40 "LEMO 00" LEMO_EPA.00.250.NTN 35.265,160.21 r90 top (schematic designator J1)
J1_U_SCH41 "LEMO 00" LEMO_EPA.00.250.NTN 24.235,168.71 r90 top (schematic designator J1)
J1_U_SCH42 "LEMO 00" LEMO_EPA.00.250.NTN 35.265,168.71 r90 top (schematic designator J1)
J1_U_SCH43 "LEMO 00" LEMO_EPA.00.250.NTN 24.235,177.21 r90 top (schematic designator J1)
J1_U_SCH44 "LEMO 00" LEMO_EPA.00.250.NTN 35.265,177.21 r90 top (schematic designator J1)
J1_U_SCH45 "LEMO 00" LEMO_EPA.00.250.NTN 24.235,185.71 r90 top (schematic designator J1)
J1_U_SCH46 "LEMO 00" LEMO_EPA.00.250.NTN 35.265,185.71 r90 top (schematic designator J1)
J1_U_SCH47 "LEMO 00" LEMO_EPA.00.250.NTN 24.235,194.21 r90 top (schematic designator J1)
J1_U_SCH48 "LEMO 00" LEMO_EPA.00.250.NTN 35.265,194.21 r90 top (schematic designator J1)
J1_U_SCH49 "LEMO 00" LEMO_EPA.00.250.NTN 24.235,202.71 r90 top (schematic designator J1)
J1_U_SCH50 "LEMO 00" LEMO_EPA.00.250.NTN 35.265,202.71 r90 top (schematic designator J1)
J1_U_SCH51 "LEMO 00" LEMO_EPA.00.250.NTN 24.235,211.21 r90 top (schematic designator J1)
J1_U_SCH52 "LEMO 00" LEMO_EPA.00.250.NTN 35.265,211.21 r90 top (schematic designator J1)
J1_U_SCH53 "LEMO 00" LEMO_EPA.00.250.NTN 24.235,219.71 r90 top (schematic designator J1)
J1_U_SCH54 "LEMO 00" LEMO_EPA.00.250.NTN 35.265,219.71 r90 top (schematic designator J1)
J1_U_SCH55 "LEMO 00" LEMO_EPA.00.250.NTN 24.235,228.21 r90 top (schematic designator J1)
J1_U_SCH56 "LEMO 00" LEMO_EPA.00.250.NTN 35.265,228.21 r90 top (schematic designator J1)
J1_U_SCH57 "LEMO 00" LEMO_EPA.00.250.NTN 24.235,236.71 r90 top (schematic designator J1)
J1_U_SCH58 "LEMO 00" LEMO_EPA.00.250.NTN 35.265,236.71 r90 top (schematic designator J1)
J1_U_SCH59 "LEMO 00" LEMO_EPA.00.250.NTN 24.235,245.21 r90 top (schematic designator J1)
J1_U_SCH60 "LEMO 00" LEMO_EPA.00.250.NTN 35.265,245.21 r90 top (schematic designator J1)
J1_U_SCH61 "LEMO 00" LEMO_EPA.00.250.NTN 10.985,236.71 r90 top (schematic designator J1)
J1_U_SCH62 "LEMO 00" LEMO_EPA.00.250.NTN 48.515,236.71 r90 top (schematic designator J1)
J1_U_SCH63 "LEMO 00" LEMO_EPA.00.250.NTN 10.985,245.21 r90 top (schematic designator J1)
J1_U_SCH64 "LEMO 00" LEMO_EPA.00.250.NTN 48.515,245.21 r90 top (schematic designator J1)
J2 "DIN 41612 Type C" "HARTING_09 03 296 6861" 50.65,91.13 r0 bottom locked
J3 "DIN 41612 Type C" "HARTING_09 03 296 6861" 4.93,91.13 r0 bottom locked
R1_U_SCH1 "300" RESC2012X60N 16.025,25.25 r90 top (schematic designator R1)
R1_U_SCH2 "300" RESC2012X60N 53.775,16.75 r90 top (schematic designator R1)
R1_U_SCH3 "300" RESC2012X60N 16.025,16.75 r90 top (schematic designator R1)
R1_U_SCH4 "300" RESC2012X60N 53.775,25.25 r90 top (schematic designator R1)
R1_U_SCH5 "300" RESC2012X60N 29.275,16.75 r90 top (schematic designator R1)
R1_U_SCH6 "300" RESC2012X60N 40.525,16.75 r90 top (schematic designator R1)
R1_U_SCH7 "300" RESC2012X60N 29.275,25.25 r90 top (schematic designator R1)
R1_U_SCH8 "300" RESC2012X60N 40.525,25.25 r90 top (schematic designator R1)
R1_U_SCH9 "300" RESC2012X60N 29.275,33.75 r90 top (schematic designator R1)
R1_U_SCH10 "300" RESC2012X60N 40.525,33.75 r90 top (schematic designator R1)
R1_U_SCH11 "300" RESC2012X60N 29.275,42.25 r90 top (schematic designator R1)
R1_U_SCH12 "300" RESC2012X60N 40.525,42.25 r90 top (schematic designator R1)
R1_U_SCH13 "300" RESC2012X60N 29.275,50.75 r90 top (schematic designator R1)
R1_U_SCH14 "300" RESC2012X60N 40.525,50.75 r90 top (schematic designator R1)
R1_U_SCH15 "300" RESC2012X60N 29.275,59.25 r90 top (schematic designator R1)
R1_U_SCH16 "300" RESC2012X60N 40.525,59.25 r90 top (schematic designator R1)
R1_U_SCH17 "300" RESC2012X60N 29.275,67.75 r90 top (schematic designator R1)
R1_U_SCH18 "300" RESC2012X60N 40.525,67.75 r90 top (schematic designator R1)
R1_U_SCH19 "300" RESC2012X60N 29.275,76.25 r90 top (schematic designator R1)
R1_U_SCH20 "300" RESC2012X60N 40.525,76.25 r90 top (schematic designator R1)
R1_U_SCH21 "300" RESC2012X60N 29.275,84.75 r90 top (schematic designator R1)
R1_U_SCH22 "300" RESC2012X60N 40.525,84.75 r90 top (schematic designator R1)
R1_U_SCH23 "300" RESC2012X60N 29.275,93.25 r90 top (schematic designator R1)
R1_U_SCH24 "300" RESC2012X60N 40.525,93.25 r90 top (schematic designator R1)
R1_U_SCH25 "300" RESC2012X60N 29.275,101.75 r90 top (schematic designator R1)
R1_U_SCH26 "300" RESC2012X60N 40.525,101.75 r90 top (schematic designator R1)
R1_U_SCH27 "300" RESC2012X60N 29.275,110.25 r90 top (schematic designator R1)
R1_U_SCH28 "300" RESC2012X60N 40.525,110.25 r90 top (schematic designator R1)
R1_U_SCH29 "300" RESC2012X60N 29.275,118.75 r90 top (schematic designator R1)
R1_U_SCH30 "300" RESC2012X60N 40.525,118.75 r90 top (schematic designator R1)
R1_U_SCH31 "300" RESC2012X60N 29.275,127.25 r90 top (schematic designator R1)
R1_U_SCH32 "300" RESC2012X60N 40.525,127.25 r90 top (schematic designator R1)
R1_U_SCH33 "300" RESC2012X60N 29.275,135.75 r90 top (schematic designator R1)
R1_U_SCH34 "300" RESC2012X60N 40.525,135.75 r90 top (schematic designator R1)
R1_U_SCH35 "300" RESC2012X60N 29.275,144.25 r90 top (schematic designator R1)
R1_U_SCH36 "300" RESC2012X60N 40.525,144.25 r90 top (schematic designator R1)
R1_U_SCH37 "300" RESC2012X60N 29.275,152.75 r90 top (schematic designator R1)
R1_U_SCH38 "300" RESC2012X60N 40.525,152.75 r90 top (schematic designator R1)
R1_U_SCH39 "300" RESC2012X60N 29.275,161.25 r90 top (schematic designator R1)
R1_U_SCH40 "300" RESC2012X60N 40.525,161.25 r90 top (schematic designator R1)
R1_U_SCH41 "300" RESC2012X60N 29.275,169.75 r90 top (schematic designator R1)
R1_U_SCH42 "300" RESC2012X60N 40.525,169.75 r90 top (schematic designator R1)
R1_U_SCH43 "300" RESC2012X60N 29.275,178.25 r90 top (schematic designator R1)
R1_U_SCH44 "300" RESC2012X60N 40.525,178.25 r90 top (schematic designator R1)
R1_U_SCH45 "300" RESC2012X60N 29.275,186.75 r90 top (schematic designator R1)
R1_U_SCH46 "300" RESC2012X60N 40.525,186.75 r90 top (schematic designator R1)
R1_U_SCH47 "300" RESC2012X60N 29.275,195.25 r90 top (schematic designator R1)
R1_U_SCH48 "300" RESC2012X60N 40.525,195.25 r90 top (schematic designator R1)
R1_U_SCH49 "300" RESC2012X60N 29.275,203.75 r90 top (schematic designator R1)
R1_U_SCH50 "300" RESC2012X60N 40.525,203.75 r90 top (schematic designator R1)
R1_U_SCH51 "300" RESC2012X60N 29.275,212.25 r90 top (schematic designator R1)
R1_U_SCH52 "300" RESC2012X60N 40.525,212.25 r90 top (schematic designator R1)
R1_U_SCH53 "300" RESC2012X60N 29.275,220.75 r90 top (schematic designator R1)
R1_U_SCH54 "300" RESC2012X60N 40.525,220.75 r90 top (schematic designator R1)
R1_U_SCH55 "300" RESC2012X60N 29.275,229.25 r90 top (schematic designator R1)
R1_U_SCH56 "300" RESC2012X60N 40.525,229.25 r90 top (schematic designator R1)
R1_U_SCH57 "300" RESC2012X60N 29.275,237.75 r90 top (schematic designator R1)
R1_U_SCH58 "300" RESC2012X60N 40.525,237.75 r90 top (schematic designator R1)
R1_U_SCH59 "300" RESC2012X60N 29.275,246.25 r90 top (schematic designator R1)
R1_U_SCH60 "300" RESC2012X60N 40.525,246.25 r90 top (schematic designator R1)
R1_U_SCH61 "300" RESC2012X60N 16.025,237.75 r90 top (schematic designator R1)
R1_U_SCH62 "300" RESC2012X60N 53.775,237.75 r90 top (schematic designator R1)
R1_U_SCH63 "300" RESC2012X60N 16.025,246.25 r90 top (schematic designator R1)
R1_U_SCH64 "300" RESC2012X60N 53.775,246.25 r90 top (schematic designator R1)
R2_U_SCH1 "51" RESC2012X60N 14.525,24.25 r180 bottom (schematic designator R2)
R2_U_SCH2 "51" RESC2012X60N 52.055,15.75 r180 bottom (schematic designator R2)
R2_U_SCH3 "51" RESC2012X60N 14.525,15.75 r180 bottom (schematic designator R2)
R2_U_SCH4 "51" RESC2012X60N 52.055,24.25 r180 bottom (schematic designator R2)
R2_U_SCH5 "51" RESC2012X60N 27.775,15.75 r180 bottom (schematic designator R2)
R2_U_SCH6 "51" RESC2012X60N 38.805,15.75 r180 bottom (schematic designator R2)
R2_U_SCH7 "51" RESC2012X60N 27.775,24.25 r180 bottom (schematic designator R2)
R2_U_SCH8 "51" RESC2012X60N 38.805,24.25 r180 bottom (schematic designator R2)
R2_U_SCH9 "51" RESC2012X60N 27.775,32.75 r180 bottom (schematic designator R2)
R2_U_SCH10 "51" RESC2012X60N 38.805,32.75 r180 bottom (schematic designator R2)
R2_U_SCH11 "51" RESC2012X60N 27.775,41.25 r180 bottom (schematic designator R2)
R2_U_SCH12 "51" RESC2012X60N 38.805,41.25 r180 bottom (schematic designator R2)
R2_U_SCH13 "51" RESC2012X60N 27.775,49.75 r180 bottom (schematic designator R2)
R2_U_SCH14 "51" RESC2012X60N 38.805,49.75 r180 bottom (schematic designator R2)
R2_U_SCH15 "51" RESC2012X60N 27.775,58.25 r180 bottom (schematic designator R2)
R2_U_SCH16 "51" RESC2012X60N 38.805,58.25 r180 bottom (schematic designator R2)
R2_U_SCH17 "51" RESC2012X60N 27.775,66.75 r180 bottom (schematic designator R2)
R2_U_SCH18 "51" RESC2012X60N 38.805,66.75 r180 bottom (schematic designator R2)
R2_U_SCH19 "51" RESC2012X60N 27.775,75.25 r180 bottom (schematic designator R2)
R2_U_SCH20 "51" RESC2012X60N 38.805,75.25 r180 bottom (schematic designator R2)
R2_U_SCH21 "51" RESC2012X60N 27.775,83.75 r180 bottom (schematic designator R2)
R2_U_SCH22 "51" RESC2012X60N 38.805,83.75 r180 bottom (schematic designator R2)
R2_U_SCH23 "51" RESC2012X60N 27.775,92.25 r180 bottom (schematic designator R2)
R2_U_SCH24 "51" RESC2012X60N 38.805,92.25 r180 bottom (schematic designator R2)
R2_U_SCH25 "51" RESC2012X60N 27.775,100.75 r180 bottom (schematic designator R2)
R2_U_SCH26 "51" RESC2012X60N 38.805,100.75 r180 bottom (schematic designator R2)
R2_U_SCH27 "51" RESC2012X60N 27.775,109.25 r180 bottom (schematic designator R2)
R2_U_SCH28 "51" RESC2012X60N 38.805,109.25 r180 bottom (schematic designator R2)
R2_U_SCH29 "51" RESC2012X60N 27.775,117.75 r180 bottom (schematic designator R2)
R2_U_SCH30 "51" RESC2012X60N 38.805,117.75 r180 bottom (schematic designator R2)
R2_U_SCH31 "51" RESC2012X60N 27.775,126.25 r180 bottom (schematic designator R2)
R2_U_SCH32 "51" RESC2012X60N 38.805,126.25 r180 bottom (schematic designator R2)
R2_U_SCH33 "51" RESC2012X60N 27.775,134.75 r180 bottom (schematic designator R2)
R2_U_SCH34 "51" RESC2012X60N 38.805,134.75 r180 bottom (schematic designator R2)
R2_U_SCH35 "51" RESC2012X60N 27.775,143.25 r180 bottom (schematic designator R2)
R2_U_SCH36 "51" RESC2012X60N 38.805,143.25 r180 bottom (schematic designator R2)
R2_U_SCH37 "51" RESC2012X60N 27.775,151.75 r180 bottom (schematic designator R2)
R2_U_SCH38 "51" RESC2012X60N 38.805,151.75 r180 bottom (schematic designator R2)
R2_U_SCH39 "51" RESC2012X60N 27.775,160.25 r180 bottom (schematic designator R2)
R2_U_SCH40 "51" RESC2012X60N 38.805,160.25 r180 bottom (schematic designator R2)
R2_U_SCH41 "51" RESC2012X60N 27.775,168.75 r180 bottom (schematic designator R2)
R2_U_SCH42 "51" RESC2012X60N 38.805,168.75 r180 bottom (schematic designator R2)
R2_U_SCH43 "51" RESC2012X60N 27.775,177.25 r180 bottom (schematic designator R2)
R2_U_SCH44 "51" RESC2012X60N 38.805,177.25 r180 bottom (schematic designator R2)
R2_U_SCH45 "51" RESC2012X60N 27.775,185.75 r180 bottom (schematic designator R2)
R2_U_SCH46 "51" RESC2012X60N 38.805,185.75 r180 bottom (schematic designator R2)
R2_U_SCH47 "51" RESC2012X60N 27.775,194.25 r180 bottom (schematic designator R2)
R2_U_SCH48 "51" RESC2012X60N 38.805,194.25 r180 bottom (schematic designator R2)
R2_U_SCH49 "51" RESC2012X60N 27.775,202.75 r180 bottom (schematic designator R2)
R2_U_SCH50 "51" RESC2012X60N 38.805,202.75 r180 bottom (schematic designator R2)
R2_U_SCH51 "51" RESC2012X60N 27.775,211.25 r180 bottom (schematic designator R2)
R2_U_SCH52 "51" RESC2012X60N 38.805,211.25 r180 bottom (schematic designator R2)
R2_U_SCH53 "51" RESC2012X60N 27.775,219.75 r180 bottom (schematic designator R2)
R2_U_SCH54 "51" RESC2012X60N 38.805,219.75 r180 bottom (schematic designator R2)
R2_U_SCH55 "51" RESC2012X60N 27.775,228.25 r180 bottom (schematic designator R2)
R2_U_SCH56 "51" RESC2012X60N 38.805,228.25 r180 bottom (schematic designator R2)
R2_U_SCH57 "51" RESC2012X60N 27.775,236.75 r180 bottom (schematic designator R2)
R2_U_SCH58 "51" RESC2012X60N 38.805,236.75 r180 bottom (schematic designator R2)
R2_U_SCH59 "51" RESC2012X60N 27.775,245.25 r180 bottom (schematic designator R2)
R2_U_SCH60 "51" RESC2012X60N 38.805,245.25 r180 bottom (schematic designator R2)
R2_U_SCH61 "51" RESC2012X60N 14.525,236.75 r180 bottom (schematic designator R2)
R2_U_SCH62 "51" RESC2012X60N 52.055,236.75 r180 bottom (schematic designator R2)
R2_U_SCH63 "51" RESC2012X60N 14.525,245.25 r180 bottom (schematic designator R2)
R2_U_SCH64 "51" RESC2012X60N 52.055,245.25 r180 bottom (schematic designator R2)

## Footprints (in the part's own frame and the unit in brackets; to place one, negate y for a bottom-side part, rotate by r counter-clockwise, add the part's x,y. Pads: shape width x height; smd on the part's side, far side on the other; paste and mask are expansions set on the pad)
CAPC2012X135N [mm] "Chip Capacitor, Body 2.0x1.25mm, IPC Medium Density"
  rect 1.05x1.4 smd: 1(-0.9,0) 2(0.9,0)
  silkscreen extent 0,-0.58 0,0.58, body extent -1.05,-0.67 1.05,0.68, height 1.25
"HARTING_09 03 296 6861" [mm] "DIN 41612, Type C, 96 Position, Rows a+b+c, Performance level 2, Press-in Lead Lead 13mm, Pitch 2.54mm, Straight Female Connector"
  round 1.5 hole 1: a1(0,0) a2(0,-2.54) a3(0,-5.08) a4(0,-7.62) a5(0,-10.16) a6(0,-12.7) a7(0,-15.24) a8(0,-17.78) a9(0,-20.32) a10(0,-22.86) a11(0,-25.4) a12(0,-27.94) a13(0,-30.48) a14(0,-33.02) a15(0,-35.56) a16(0,-38.1) a17(0,-40.64) a18(0,-43.18) a19(0,-45.72) a20(0,-48.26) a21(0,-50.8) a22(0,-53.34) a23(0,-55.88) a24(0,-58.42) a25(0,-60.96) a26(0,-63.5) a27(0,-66.04) a28(0,-68.58) a29(0,-71.12) a30(0,-73.66) a31(0,-76.2) a32(0,-78.74) b1(2.54,0) b2(2.54,-2.54) b3(2.54,-5.08) b4(2.54,-7.62) b5(2.54,-10.16) b6(2.54,-12.7) b7(2.54,-15.24) b8(2.54,-17.78) b9(2.54,-20.32) b10(2.54,-22.86) b11(2.54,-25.4) b12(2.54,-27.94) b13(2.54,-30.48) b14(2.54,-33.02) b15(2.54,-35.56) b16(2.54,-38.1) b17(2.54,-40.64) b18(2.54,-43.18) b19(2.54,-45.72) b20(2.54,-48.26) b21(2.54,-50.8) b22(2.54,-53.34) b23(2.54,-55.88) b24(2.54,-58.42) b25(2.54,-60.96) b26(2.54,-63.5) b27(2.54,-66.04) b28(2.54,-68.58) b29(2.54,-71.12) b30(2.54,-73.66) b31(2.54,-76.2) b32(2.54,-78.74) c1(5.08,0) c2(5.08,-2.54) c3(5.08,-5.08) c4(5.08,-7.62) c5(5.08,-10.16) c6(5.08,-12.7) c7(5.08,-15.24) c8(5.08,-17.78) c9(5.08,-20.32) c10(5.08,-22.86) c11(5.08,-25.4) c12(5.08,-27.94) c13(5.08,-30.48) c14(5.08,-33.02) c15(5.08,-35.56) c16(5.08,-38.1) c17(5.08,-40.64) c18(5.08,-43.18) c19(5.08,-45.72) c20(5.08,-48.26) c21(5.08,-50.8) c22(5.08,-53.34) c23(5.08,-55.88) c24(5.08,-58.42) c25(5.08,-60.96) c26(5.08,-63.5) c27(5.08,-66.04) c28(5.08,-68.58) c29(5.08,-71.12) c30(5.08,-73.66) c31(5.08,-76.2) c32(5.08,-78.74)
  round 3.5 / inner round 3.5 / far side round 5.1 hole 2.8: MTG1(2.24,5.63) MTG2(2.24,-84.37)
  silkscreen extent -2.76,-86.87 7.84,8.13, body extent -2.76,-86.87 7.84,8.13, height 11.6
LEMO_EPA.00.250.NTN [mm] "50 Ohm size 00 Coaxial Straight socket"
  round 1.6 hole 0.9: 1(0,0) 2(-2.54,-2.54) 2(-2.54,2.54) 2(2.54,-2.54) 2(2.54,2.54)
  silkscreen extent -3.81,-3.81 3.81,3.81, body extent -3.5,-3.5 3.5,3.5, height 14
RESC2012X60N [mm] "Chip Resistor, EIA 0805, Metric 2012, Body 2.0x1.2mm, IPC Medium Density"
  rect 0.95x1.4 smd: 1(-1,0) 2(1,0)
  silkscreen extent 0,-0.55 0,0.55, body extent -1.1,-0.67 1.1,0.68, height 0.6